# Altium PCB B293A MiRLIN Integrated PIC32.PcbDoc (part 3 of 3)
Units mm, origin at the board's own origin, x right, y up, seen from the top; angles counter-clockwise.
Board outline 134.25 x 90.25 mm, 4 copper layers (Component Side, Ground Plane, Power Plane, Solder Side), stack 0.651 mm thick; 223 components, 154 nets, 813 pads, 160 vias.
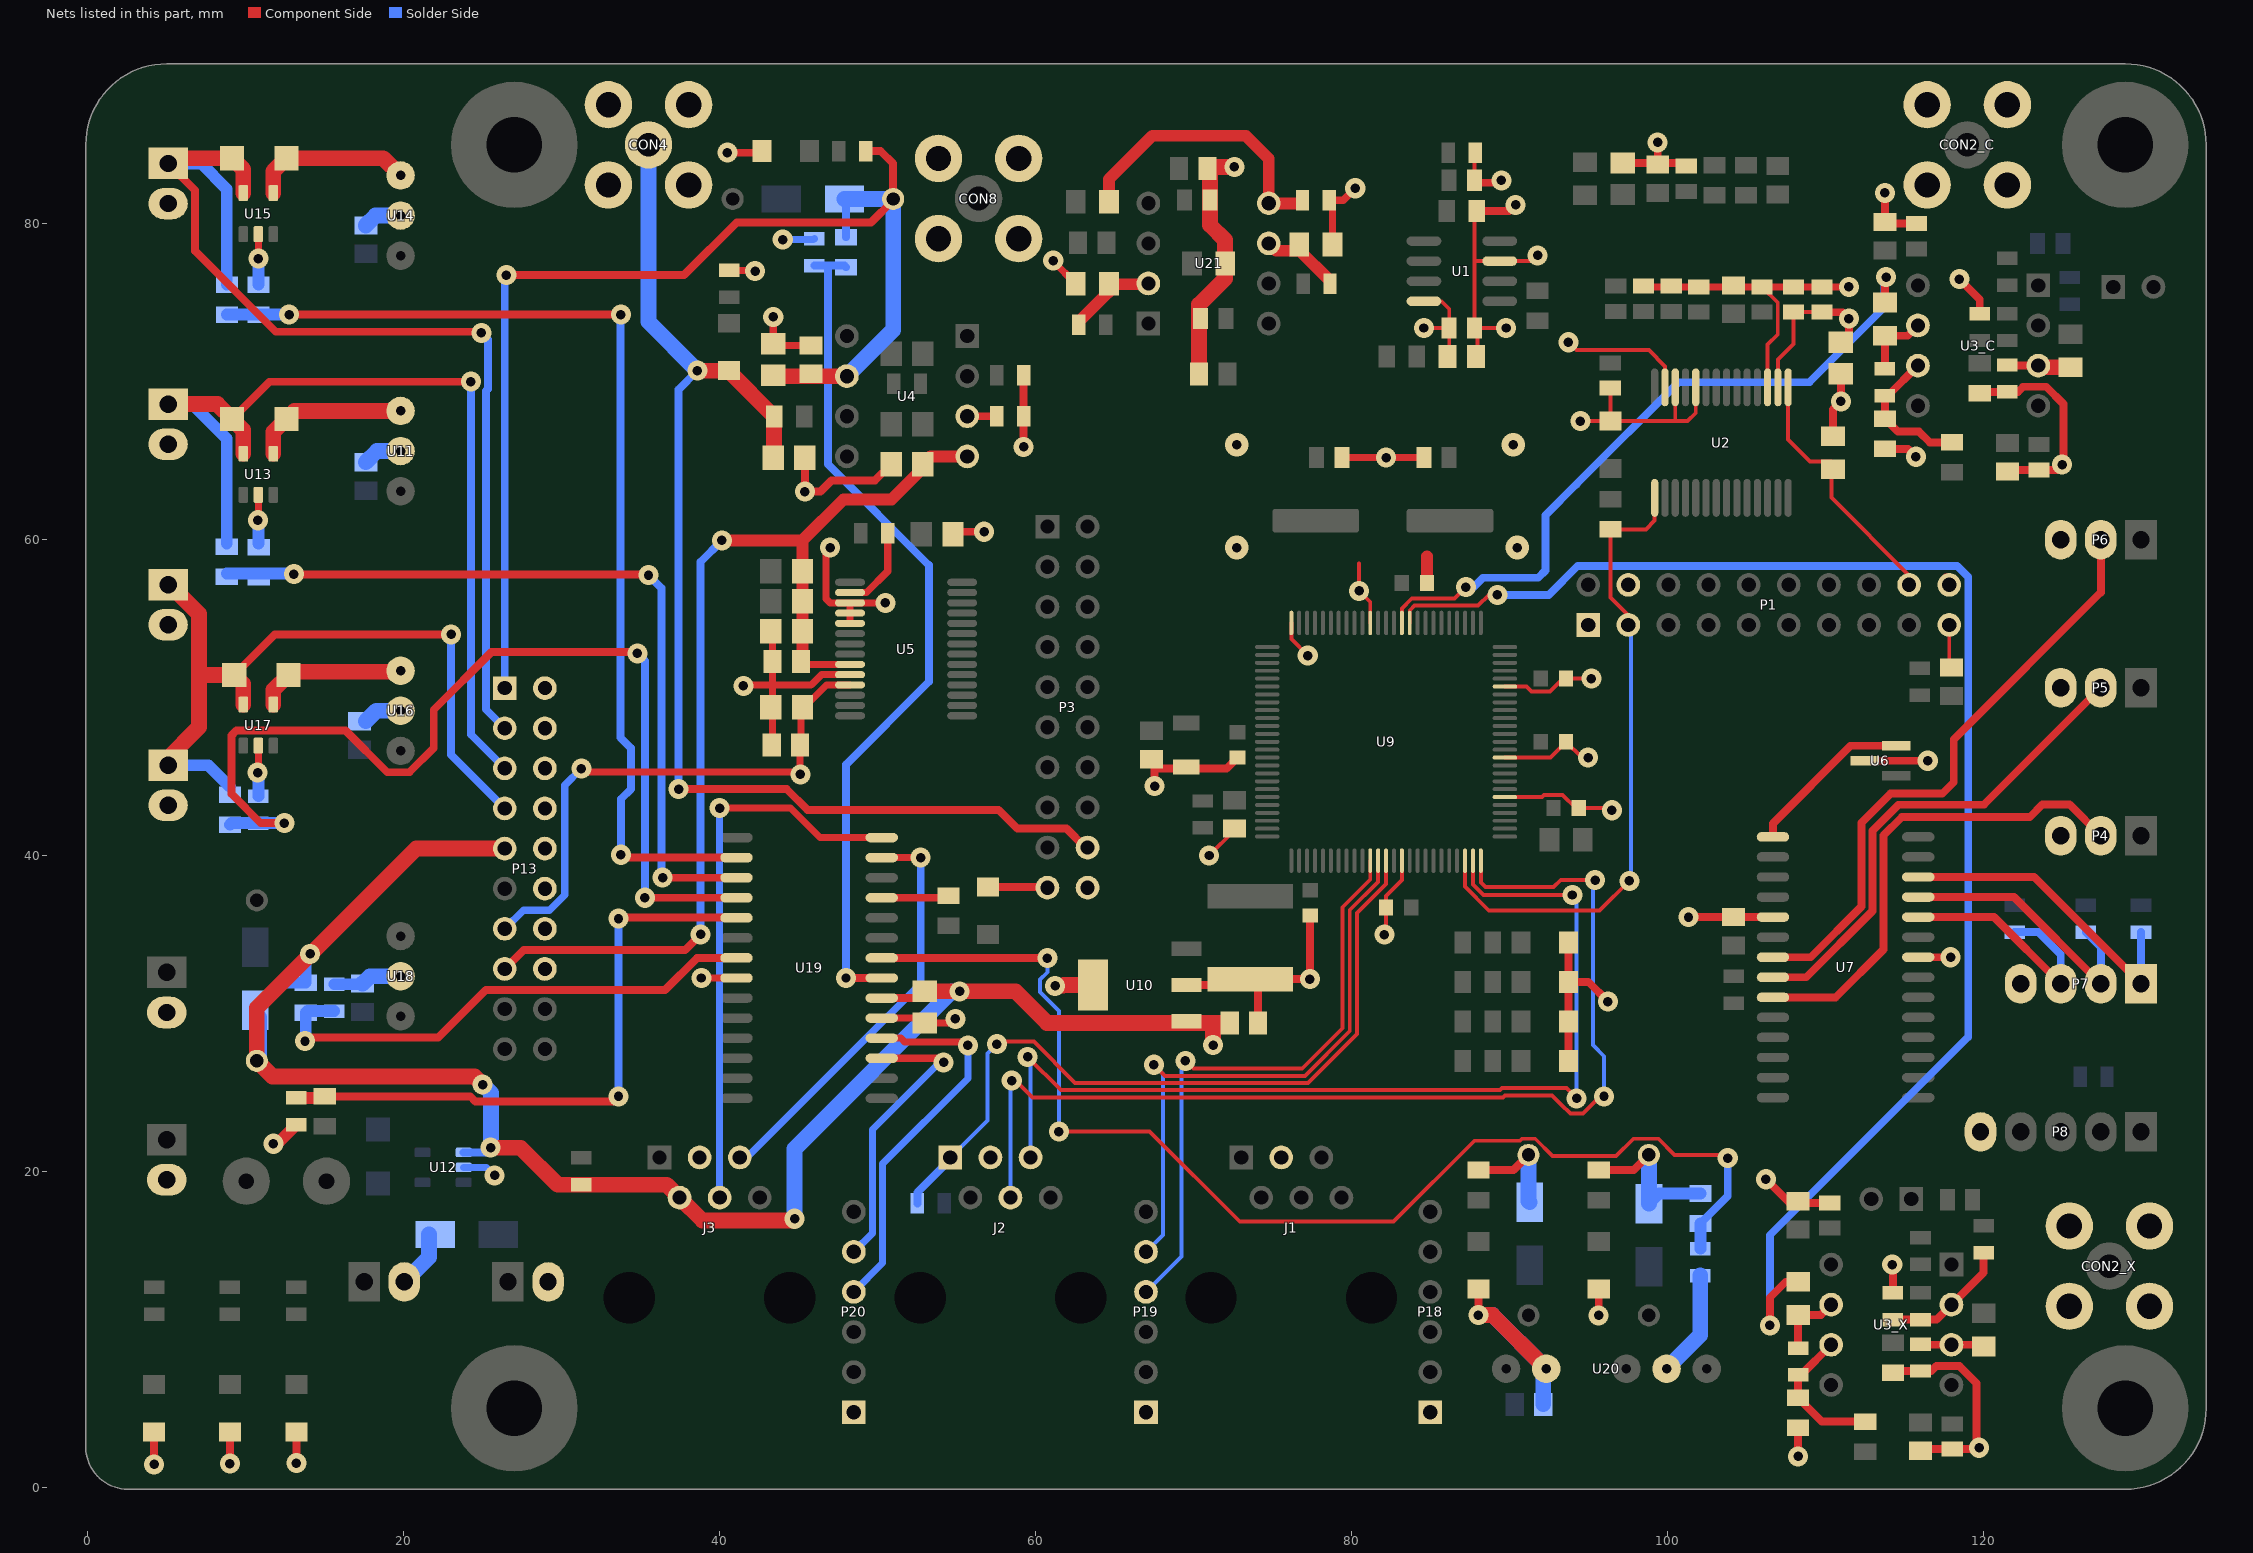
[diagram p5: the nets of this part, all layers, seen from the top]

## Via types
v1: diameter 1.27, hole 0.6, Component Side to Solder Side, 155 vias
v2: diameter 1.5, hole 0.6, Component Side to Solder Side, 5 vias

## Nets (pads, with @x,y where several pads share a name; then routed paths per layer and width w, separated by ;. In a path a pad name is that pad's centre, name@x,y a point inside that pad or via, vN(x,y) a via of type N, cw(c..) or ccw(c..) an arc to the next point about the centre after c; other vN are vias at no path point) (continued)
NetR10_X_1: R10_X.1 R11_X.1 R18_X.2 U3_X.2 | length 8.2
  Component Side w0.5: R18_X.2@114.29,10.61 R11_X.1@116.04,10.61 117.05,10.61 U3_X.2@118,11.56 120.04,13.6 R10_X.1@120.04,14.86
NetR12_C_1: R12_C.1 R13_C.1 R20_C.2 U3_C.6 | length 9.2
  Component Side w0.5: U3_C.6@115.88,71.02 113.97,69.11 R13_C.1@113.79,69.11 R20_C.2@113.79,67.66 114.615,66.835 115.949,66.835 116.624,66.16 R12_C.1@118.04,66.16
NetR12_X_1: R12_X.1 R13_X.1 R20_X.2 U3_X.6 | length 9.2
  Component Side w0.5: U3_X.6@110.38,9.02 108.47,7.11 R13_X.1@108.29,7.11 R20_X.2@108.29,5.66 109.79,4.16 R12_X.1@112.54,4.16
NetR13_C_2: R13_C.2 R16_C.1 U3_C.7 | length 4.5
  Component Side w0.5: R13_C.2@113.79,70.81 R16_C.1@113.79,72.91 115.23,72.91 U3_C.7@115.88,73.56
NetR13_X_2: R13_X.2 R16_X.1 U3_X.7 | length 4.5
  Component Side w0.5: R13_X.2@108.29,8.81 R16_X.1@108.29,10.91 109.73,10.91 U3_X.7@110.38,11.56
NetR15_C_1: R15_C.1 R17_C.2 U3_C.3 | length 4.1
  Component Side w0.5: R17_C.2@121.54,71.06 121.58,71.02 U3_C.3@123.5,71.02
  Component Side w1: U3_C.3@123.5,71.02 123.61,70.91 R15_C.1@125.54,70.91
NetR15_X_1: R15_X.1 R17_X.2 U3_X.3 | length 4.1
  Component Side w0.5: R17_X.2@116.04,9.06 116.08,9.02 U3_X.3@118,9.02 119.93,9.02 R15_X.1@120.04,8.91
NetR16_C_2: R16_C.2 U9.61 | length 45
  Component Side w0.25: U9.61@83.2,54.725 83.2,55.648 83.827,56.275 86.525,56.275 v1(87.25,57)
  Component Side w0.5: R16_C.2@113.79,75.01 113.79,76.553 v1(113.865,76.628)
  Solder Side w0.5: v1(87.25,57) 87.75,57 88.335,57.585 91.835,57.585 92.293,58.043 92.293,61.542 94.25,63.5 100.716,69.966 109,69.966 113.75,74.716 113.75,76.513 v1(113.865,76.628)
NetR16_X_2: R16_X.2 U9.60 | length 94.2
  Component Side w0.25: U9.60@83.7,54.725 83.7,55.511 84.014,55.825 88.035,55.825 88.71,56.5 v1(89.25,56.5)
  Component Side w0.5: v1@106.5,10.25 106.5,12 107.51,13.01 R16_X.2@108.29,13.01
  Solder Side w0.5: v1(89.25,56.5) 92.5,56.5 94.34,58.34 118.357,58.34 119.06,57.637 119.06,28.516 106.5,15.956 v1(106.5,10.25)
NetR23_1: R23.1 U5.16 | length 5.3
  Component Side w0.45: U5.16@48.26,56.65 49.3,56.65 50.65,58 R23.1@50.65,60.4
NetR25_2: R25.2 U4.3 | length 1.9
  Component Side w0.45: U4.3@55.68,67.81 57.54,67.81 R25.2@57.55,67.8
NetR41_1: R41.1 U11.3 U13.4 | length 9.6
  Component Side w1: U13.4@11.745,65.435 11.745,66.815 R41.1@12.57,67.64 13.08,68.15 U11.3@19.46,68.15
NetR46_1: R46.1 U14.3 U15.4 | length 10.2
  Component Side w1: U15.4@11.745,81.945 11.745,83.325 R46.1@12.57,84.15 18.71,84.15 U14.3@19.8,83.06
NetR53_1: R53.1 U16.3 U17.4 | length 9.1
  Component Side w1: U17.4@11.745,49.56 11.745,50.48 R53.1@12.7,51.435 12.905,51.64 U16.3@19.46,51.64
NetR63_1: R63.1 R67.2 U21.6 | length 5.7
  Component Side w0.75: U21.6@74.77,78.76 75.24,78.29 R67.2@76.71,78.29 ; R67.2@76.91,78.49 R67.2@76.71,78.69 76.71,78.328 78.65,76.388 R63.1@78.65,76.2
NetR64_1: R64.1 R69.2 U21.2 | length 5.9
  Component Side w0.75: R64.1@62.75,73.6 62.75,73.788 64.65,75.688 R69.2@64.65,76.2 64.675,76.175 67.105,76.175 U21.2@67.15,76.22
NetR65_1: R65.1 R66.2 U21.5 | length 18.1
  Component Side w0.75: R65.1@64.65,81.4 64.65,82.817 67.408,85.575 73.326,85.575 74.77,84.131 U21.5@74.77,81.3 74.78,81.29 R66.2@76.71,81.29
NetR70_2: R70.2 U19.25 | length 4.3
  Component Side w0.5: U19.25@50.27,37.325 54.375,37.325 R70.2@54.5,37.45
OE#: P1.18 R8.1 U2.15 | length 15.9
  Component Side w0.25: U2.15@107.66,69.645 107.66,66.34 109.05,64.95 110.4,64.95 110.4,64.45 110.4,62.66 P1.18@115.32,57.74
OVR: P1.3 R9.2 U2.1 U9.23 | length 40.2
  Component Side w0.25: U9.23@87.2,39.675 87.2,38.027 88.701,36.526 95.726,36.526 v1(97.6,38.4) ; P1.3@97.54,55.2 96.4,56.34 R9.2@96.4,60.65 98.66,60.65 99.21,61.2 U2.1@99.21,62.645
  Solder Side w0.25: P1.3@97.54,54.6 97.71,54.43 97.71,38.51 v1(97.6,38.4)
P32_MCLR#: J2.1 R34.2 U9.13 | length 49.3
  Component Side w0.25: v1(57.554,28.054) 57.71,28.21 59.898,28.21 62.518,25.59 77.249,25.59 80.35,28.691 80.35,36.35 82.2,38.2 U9.13@82.2,39.675
  Component Side w0.5: J2.1@54.205,20.83 54.383,20.653 J2.1@54.495,20.54
  Solder Side w0.25: J2.1@54.61,20.88 56.965,23.235 56.965,27.465 v1(57.554,28.054)
  Solder Side w0.5: R34.2@52.525,17.975 52.525,18.675 J2.1@54.52,20.67
P32_PGEC: J2.5 U9.24 | length 63.5
  Component Side w0.25: v1(59.5,27.25) 61.61,25.14 89.416,25.14 89.542,25.267 93.619,25.267 v1(94.264,24.622) ; U9.24@87.7,39.675 87.7,38.164 88.364,37.5 v1(94,37.5)
  Solder Side w0.25: v1(59.5,27.25) 59.69,27.06 J2.5@59.69,20.88 ; v1(94,37.5) 94.264,37.236 v1(94.264,24.622)
P32_PGED: J2.4 U9.25 | length 69.3
  Component Side w0.25: v1(58.5,25.75) 58.75,25.75 59.81,24.69 89.602,24.69 89.729,24.817 92.711,24.817 93.29,24.238 93.866,23.662 94.662,23.662 95.75,24.75 v1(96,24.75) ; U9.25@88.2,39.675 88.2,38.3 88.5,38 92.8,38 93.26,38.46 95.42,38.46 v1(95.44,38.44)
  Solder Side w0.25: J2.4@58.42,18.34 58.42,25.67 v1(58.5,25.75) ; v1(95.44,38.44) 95.29,38.29 95.29,28 96,27.29 v1(96,24.75)
P32_RX: P19.4 U9.11 | length 38.2
  Component Side w0.25: v1(69.5,27) 70,26.5 76.886,26.5 79.45,29.064 79.45,36.723 81.2,38.473 U9.11@81.2,39.675
  Solder Side w0.25: P19.4@67,12.37 69.25,14.62 69.25,26.75 v1(69.5,27)
P32_TX: P19.5 U9.12 | length 37.9
  Component Side w0.25: v1(67.5,26.75) 68.21,26.04 77.063,26.04 79.9,28.877 79.9,36.536 81.7,38.336 U9.12@81.7,39.675
  Solder Side w0.25: P19.5@67,14.91 68.075,15.985 68.075,26.175 v1(67.5,26.75)
PGEC: J3.5 U19.27 | length 28.3
  Component Side w0.45: v1(52.735,39.865) v1@52.335,39.865 ; v1@52.335,39.865 U19.27@50.27,39.865 51.8,39.865 v1@52.335,39.865
  Solder Side w0.45: J3.5@41.575,20.74 52.735,31.9 v1(52.735,39.865)
PGED: J3.4 U19.28 | length 35.7
  Component Side w0.45: J3.4@40,18.345 J3.4@40.005,18.34 ; v1(40,43) 44.5,43 46.365,41.135 U19.28@50.27,41.135
  Solder Side w0.45: J3.4@40,18.345 v1(40,43)
PIC_RS232_RX: P20.4 U19.18 | length 24.2
  Component Side w0.45: U19.18@50.27,28.435 51.484,28.435 51.719,28.2 55.504,28.2 v1(55.72,27.983)
  Solder Side w0.45: P20.4@48.5,12.37 50.325,14.195 50.325,20.48 55.72,25.875 v1(55.72,27.983)
PIC_RS232_TX: P20.5 U19.17 | length 18.5
  Component Side w0.45: U19.17@50.27,27.165 53.914,27.165 v1(54.179,26.9)
  Solder Side w0.45: P20.5@48.5,14.91 49.675,16.085 49.675,22.654 53.821,26.8 54.079,26.8 v1(54.179,26.9)
TEMP0: U6.2 U7.15 | length 10.7
  Component Side w0.5: U7.15@106.695,41.18 106.695,42.031 111.614,46.95 U6.2@114.5,46.95
TEMP1: P4.2 U7.23 | length 30.9
  Component Side w0.5: U7.23@106.695,31.02 110.666,31.02 113.7,34.054 113.7,41.277 114.849,42.427 122.957,42.427 123.769,43.238 125.472,43.238 P4.2@127.46,41.25
TEMP2: P5.2 U7.22 | length 31.3
  Component Side w0.5: U7.22@106.695,32.29 108.807,32.29 113,36.483 113,41.567 114.648,43.215 120.05,43.215 P5.2@127.46,50.625
TEMP3: P6.2 U7.21 | length 38.4
  Component Side w0.5: U7.21@106.695,33.56 109.087,33.56 112.3,36.773 112.3,42.074 114.142,43.915 117.418,43.915 118.142,44.639 118.142,47.347 127.46,56.665 P6.2@127.46,60
TRIG0: P7.1 R30.1 U7.12 | length 20.7
  Component Side w0.5: U7.12@115.379,38.64 U7.12@115.895,38.64 123.235,38.64 P7.1@130,31.875
  Solder Side w0.5: P7.1@130,31.875 R30.1@130,35.15
TRIG1: P7.2 R29.1 U7.11 | length 17.5
  Component Side w0.5: U7.11@115.895,37.37 121.965,37.37 P7.2@127.46,31.875
  Solder Side w0.5: R29.1@126.5,35.15 127.46,34.19 P7.2@127.46,31.875
TRIG2: P7.3 R28.1 U7.10 | length 16.1
  Component Side w0.5: U7.10@115.895,36.1 120.695,36.1 P7.3@124.92,31.875
  Solder Side w0.5: R28.1@122,35.15 123.5,35.15 124.92,33.73 P7.3@124.92,31.875
V_+5VDC: C43.1 C56.1 D1.1 J3.2 L2.2 P13.9 R56.2 R58.1 U10.1 U12.1 U19.20 | length 117.5
  Component Side w0.5: U19.20@50.27,30.975 52.575,30.975 C56.1@53,31.4
  Component Side w1: v1(25,25.5) 24.5,26 11.7,26 L2.2@10.7,27 10.7,30.35 14.098,33.748 20.79,40.44 P13.9@26.4,40.44 ; v1(25.5,21.5) 27.4,21.5 29.75,19.15 R58.1@31.25,19.15 36.655,19.15 J3.2@37.465,18.34 38.915,16.89 44.64,16.89 v1(44.75,17) ; C56.1@53,31.4 v1(55.2,31.4) 58.738,31.4 60.738,29.4 69.55,29.4 71.25,29.4 ; v1(71.25,28) 71.25,29.4 ; C43.1@72.3,29.4 71.25,29.4
  Solder Side w0.5: U12.1@23.795,21.2 25.2,21.2 v1(25.5,21.5)
  Solder Side w0.75: D1.1@10.6,30.2 12.35,31.95 R56.2@13.8,31.95 13.8,33.45 14.071,33.721 v1(14.071,33.775)
  Solder Side w1: L2.2@10.7,27 10.83,27.13 D1.1@10.83,29.75 ; v1(25,25.5) 25.535,24.965 25.535,21.535 v1(25.5,21.5) ; v1(44.75,17) 44.75,21.438 54.712,31.4 v1(55.2,31.4)
V_+5VDCA: C1.2 C2.2 C14.2 C15.2 C16.2 C34.2 C35.2 D3.1 L4.2 P1.1 P13.13 R4.1 R48.2 R61.2 U1.7 U2.16 U2.27 U5.25 | length 81.1
  Component Side w0.25: C1.2@87.9,73.3 88,73.2 C2.2@88,71.6 ; R4.1@87.95,80.8 87.8,80.65 87.8,77.6 ; v1(89.8,73.4) C1.2@87.8,73.4 87.8,77.6 ; v1(91.8,78) 91.435,77.635 U1.7@89.4,77.635 87.835,77.635 87.8,77.6 ; v1(93.75,72.5) 94.25,72 98.836,72 99.86,70.976 U2.27@99.86,69.645 ; U2.16@107.01,69.645 107.01,71.41 108,72.4 C14.2@108,74.4 109.6,74.4 C15.2@109.7,74.3 ; v1@111.375,73.875 v1@111.5,73.75
  Component Side w0.45: v1(31.25,45.5) 31.45,45.3 45.1,45.3 C35.2@45.1,47 ; C35.2@45.15,47.47 45.15,49.275 C34.2@45.25,49.375 45.355,49.375 46.78,50.8 U5.25@48.26,50.8
  Component Side w0.5: R4.1@87.95,80.8 90,80.8 v1(90.4,81.2) ; R48.2@95.665,20.085 97.885,20.085 L4.2@98.84,21.04 ; C15.2@109.8,74.4 111.1,74.4 v1(111.5,74) ; C16.2@111.5,72.25 111.5,72.5 v1@111.5,73.75
  Solder Side w0.45: P13.13@26.4,35.36 27.575,36.535 29.237,36.535 30.2,37.498 30.2,44.45 v1(31.25,45.5)
  Solder Side w0.75: D3.1@98.84,17.96 99.48,18.6 R61.2@102.1,18.6
  Solder Side w1: D3.1@98.84,17.96 L4.2@98.84,21.04 L4.2@98.935,21.135
  other v1: 45.112,45.142
V_+24VDCA: C25.2 C26.1 D2.1 L3.2 P13.1 R47.2 R59.2 U4.7 | length 79.9
  Component Side w0.5: v1(26.5,76.75) 37.75,76.75 41.085,80.085 49.585,80.085 50.99,81.49 L3.2@50.99,81.57 50.99,83.81 50.2,84.6 R47.2@49.25,84.6 R47.2@49.25,84.611 ; C26.1@42.96,70.4 C26.1@43.4,70.4
  Component Side w1: C26.1@43.85,70.35 45.8,70.35 U4.7@48.06,70.35
  Solder Side w0.5: P13.1@26.4,50.6 26.4,76.75 26.4,76.85 v1(26.5,76.75) ; D2.1@47.91,81.57 48,81.48 R59.2@48,79.15
  Solder Side w1: D2.1@47.91,81.57 L3.2@50.99,81.57 50.99,73.28 U4.7@48.06,70.35
V_-5VDCA: C29.2 C30.1 C31.1 C32.1 C33.2 D4.2 L5.2 P13.15 R51.1 U4.4 U5.23 | length 74.1
  Component Side w0.45: C32.1@45.17,52.1 U5.23@48.26,52.1
  Component Side w0.5: P13.15@26.4,32.82 27.6,34.02 37.82,34.02 v1(38.8,35) ; R51.1@88.045,20.085 90.265,20.085 L5.2@91.22,21.04
  Component Side w0.75: v1(40.15,59.95) 45.25,59.95 ; C32.1@45.15,52.28 45.25,52.38 C33.2@45.25,54.185 C31.1@45.25,56.09 C30.1@45.25,57.995 45.25,59.95 ; U4.4@55.68,65.27 53.36,65.27 C29.2@52.87,64.78 52.87,64.517 50.903,62.55 47.85,62.55 45.25,59.95
  Solder Side w0.5: v1(38.8,35) 38.8,58.6 v1(40.15,59.95)
  Solder Side w1: L5.2@91.22,21.04 91.22,18.13 D4.2@91.3,18.05
V_MMIC: P13.7 P14.1 P15.1 R53.2 R54.2 U17.5 | length 48.9
  Component Side w0.5: R53.2@9.271,51.435 11.836,54 v1(23,54)
  Component Side w1: P15.1@4.95,46.05 7.03,48.13 7.03,51.4 ; P14.1@5.08,57.15 5.194,57.15 7.03,55.314 7.03,51.4 ; U17.5@9.845,49.56 9.845,50.861 R53.2@9.271,51.435 7.065,51.435 7.03,51.4
  Solder Side w0.5: v1(23,54) 23,46.38 P13.7@26.4,42.98
  Solder Side w0.75: P15.1@5.08,45.72 7.63,45.72 R54.2@9,44.35
V_MULT: P12.1 P13.3 R46.2 R50.2 U15.5 | length 69.5
  Component Side w0.5: P12.1@5.08,83.82 6.78,82.12 6.78,78.286 11.901,73.165 24.915,73.165 v1(24.915,73.085)
  Component Side w1: P12.1@5.08,83.82 5.41,84.15 R46.2@9.141,84.15 9.845,83.446 U15.5@9.845,81.945
  Solder Side w0.5: v1(24.915,73.085) 25.335,72.665 25.335,69.551 25.2,69.416 25.2,49.26 P13.3@26.4,48.06
  Solder Side w0.75: P12.1@5.08,83.82 7.18,83.82 8.8,82.2 R50.2@8.8,76.15
V_VCO: P10.1 P13.5 R41.2 R43.2 U13.5 | length 59.7
  Component Side w0.5: R41.2@9.141,67.64 11.501,70 v1(24.25,70)
  Component Side w1: P10.1@5.08,68.58 8.201,68.58 R41.2@9.141,67.64 9.845,66.936 U13.5@9.845,65.435
  Solder Side w0.5: v1(24.25,70) 24.25,47.67 P13.5@26.4,45.52
  Solder Side w0.75: P10.1@5.08,68.58 6.62,68.58 8.8,66.4 R43.2@8.8,59.75
VM_+5VDC: R56.1 R57.2 U19.7 | length 32.7
  Component Side w0.5: v1@13.8,28.6 13.93,28.47 22.19,28.47 25.2,31.48 36.546,31.48 38.581,33.515 U19.7@41.07,33.515
  Solder Side w0.75: v1@13.8,28.6 R56.1@13.8,30.05 13.9,30.15 R57.2@15.6,30.15
  other v1: 13.75,28.25
VM_+5VDCA: R61.1 R62.2 U19.22 | length 76.9
  Component Side w0.25: v1(61.485,22.515) 67.235,22.515 72.935,16.815 82.673,16.815 87.796,21.939 90.669,21.939 90.795,22.065 91.645,22.065 92.748,20.962 96.751,20.962 97.855,22.065 99.441,22.065 100.466,21.04 103.639,21.04 v1(103.835,20.843)
  Component Side w0.5: U19.22@50.27,33.515 60.735,33.515 v1(60.75,33.5)
  Solder Side w0.25: v1(60.75,33.5) 60.75,32.608 60.29,32.148 60.29,31.352 61.485,30.157 v1(61.485,22.515)
  Solder Side w0.5: R61.1@102.1,16.7 103.835,18.435 v1(103.835,20.843)
  Solder Side w0.75: R62.2@102.1,15.1 R61.1@102.1,16.7
VM_+24VDCA: R59.1 R60.2 U19.21 | length 54.3
  Component Side w0.5: v1(48.005,32.245) U19.21@50.27,32.245
  Solder Side w0.5: R60.2@46,77.35 46.95,77.35 ; R59.1@48,77.25 47.9,77.35 46.95,77.35 ; v1(48.005,32.245) 48.005,45.755 53.25,51 53.25,58.383 46.86,64.773 46.86,77.26 46.95,77.35
VM_BAT: R42.1 R45.2 U19.5 | length 39.5
  Component Side w0.5: R42.1@15,24.75 24.216,24.75 24.551,24.415 33.265,24.415 v1(33.6,24.75) ; v1(33.6,36) 33.685,36.085 41.04,36.085 U19.5@41.07,36.055
  Component Side w0.75: R45.2@13.2,24.65 14.9,24.65 R42.1@15,24.75
  Solder Side w0.5: v1(33.6,24.75) v1(33.6,36)
VM_MMIC: R54.1 R55.2 U19.4 | length 64.3
  Component Side w0.5: v1(12.45,42.05) 10.95,42.05 9.095,43.905 9.095,47.602 9.403,47.91 16.315,47.91 18.955,45.27 20.359,45.27 21.9,46.811 21.9,49.226 25.559,52.885 34.715,52.885 v1(34.8,52.8) ; v1(35.275,37.325) U19.4@41.07,37.325
  Solder Side w0.5: v1(34.8,52.8) 35.275,52.325 v1(35.275,37.325)
  Solder Side w0.75: R54.1@9,41.95 9.1,42.05 R55.2@10.8,42.05 v1(12.45,42.05)
VM_MULT: R50.1 R52.2 U19.2 | length 67.1
  Component Side w0.5: v1(12.75,74.25) v1(33.75,74.25) ; v1(33.75,40.05) 33.935,39.865 U19.2@41.07,39.865
  Solder Side w0.5: v1(33.75,40.05) 33.75,43.566 34.385,44.201 34.385,46.799 33.715,47.469 33.715,74.215 v1(33.75,74.25)
  Solder Side w0.75: R50.1@8.8,74.25 R52.2@10.8,74.25 v1(12.75,74.25)
VM_VCO: R43.1 R44.2 U19.3 | length 50.9
  Component Side w0.5: v1(13.048,57.821) 13.068,57.8 35.45,57.8 v1(35.5,57.75) ; v1(36.395,38.595) U19.3@41.07,38.595
  Solder Side w0.5: v1(35.5,57.75) 36.322,56.928 36.322,38.668 v1(36.395,38.595)
  Solder Side w0.75: R43.1@8.8,57.85 10.82,57.85 13.018,57.85 v1(13.048,57.821)
VOUT: C28.1 CON4.1 L1.A P3.18 R24.1 | length 78.7
  Component Side w0.5: v1(37.407,44.201) 44.254,44.201 45.563,42.891 57.665,42.891 58.851,41.705 61.96,41.705 63.16,40.505 P3.18@63.3,40.505 ; v1(38.593,70.7) v1@38.9,70.7
  Component Side w1: v1@38.9,70.7 L1.A@40.55,70.7 ; L1.A@40.6,70.7 L1.A@40.55,70.7 ; C28.1@43.4,65.2 43.45,65.25 R24.1@43.45,67.8 40.575,70.675 L1.A@40.55,70.7
  Solder Side w0.5: v1(37.407,44.201) 37.407,69.514 v1(38.593,70.7)
  Solder Side w1: CON4.1@35.5,85 35.5,73.793 v1(38.593,70.7)
VSS: C1.1 C2.1 C3.1 C4.1 C5.1 C8.1 C9.1 C10.1 C11.1 C12.1 C13.1 C14.1 C15.1 C16.1 C17.2 C19_C.1 C19_X.1 C20_C.1 C20_X.1 C21_C.1 C21_X.1 C22_C.1 C22_X.1 C25.1 C26.2 C27.1 C28.2 C29.1 C32.2 C33.1 C34.1 C35.1 C36.2 C37.2 C38.2 C39.2 C40.1 C41.1 C42.2 C43.2 C44.2 C45.2 C46.2 C47.2 C48.2 C49.2 C50.2 C51.1 C52.1 C53.1 C54.1 C55.1 C56.2 C57.1 C58.1 C60.1 C61.1 C62.1 CON2_C.2 CON2_C.3 CON2_C.4 CON2_C.5 CON2_X.2 CON2_X.3 CON2_X.4 CON2_X.5 CON4.2 CON4.3 CON4.4 CON4.5 CON8.2 CON8.3 CON8.4 CON8.5 D5.1 J1.3 J2.3 J3.3 LED1.K LED2.K LED3.K LED4.K LED5.K LED6.A LED7.K LED8.K LED9.K LED10.K LED11.K LED12.K P1.4 P1.19 P1.20 P3.19 P3.20 P4.3 P5.3 P6.3 P7.4 P8.5 P9.2 P10.2 P11.2 P12.2 P13.2 P13.4 P13.6 P13.8 P13.10 P13.12 P13.14 P13.16 P14.2 P15.2 P16.2 P17.2 P18.1 P19.1 P20.1 R6.2 R8.2 R17_C.1 R17_X.1 R18_C.1 R18_X.1 R19_C.1 R19_X.1 R20_C.1 R20_X.1 R22.2 R25.1 R26.1 R44.1 R45.1 R52.1 R55.1 R57.1 R60.1 R62.1 R66.1 R67.1 R68.1 R69.1 U1.4 U2.17 U2.24 U2.26 U5.17 U5.18 U5.19 U5.24 U6.3 U7.8 U7.19 U9.15 U9.31 U9.36 U9.45 U9.65 U9.75 U10.2 U10.4 U11.2 U12.2 U13.2 U14.2 U15.2 U16.2 U17.2 U18.2 U19.8 U19.19 U20.2 U20.5 | length 328.9
  Component Side w0.25: v1(71,40) 72.6,41.6 C42.2@72.6,41.7 ; U9.75@76.2,54.725 76.2,53.7 v1(77.24,52.66) ; 80.5,58.5 v1(80.5,56.75) 81.2,56.05 U9.65@81.2,54.725 ; v1(82.09,34.991) 82.2,35.102 C45.2@82.2,36.7 82.2,37.45 83.2,38.45 U9.15@83.2,39.675 ; v1(84.6,73.4) C1.1@86.2,73.4 ; U1.4@84.6,75.095 85.705,75.095 86.2,74.6 C1.1@86.2,73.4 ; C2.1@86.1,71.6 C2.1@86.2,71.7 ; C2.1@86.2,71.6 C2.1@86.2,71.7 ; C5.1@87.8,82.6 C5.1@87.8,82.75 87.8,84.15 R6.2@87.85,84.2 ; U9.31@89.725,43.7 92.086,43.7 92.211,43.825 93.385,43.825 94.21,43 C46.2@94.4,43 96.368,43 v1(96.502,42.866) ; U9.36@89.725,46.2 92.6,46.2 C47.2@93.6,47.2 94.6,46.2 v1(95,46.2) ; U9.45@89.725,50.7 91.09,50.7 91.415,50.375 92.585,50.375 93.41,51.2 C48.2@93.6,51.2 v1(95.2,51.2) ; v1(94.5,67.5) LED1.K@96.4,67.5 ; C17.2@96.4,69.6 LED1.K@96.4,67.5 ; U2.26@100.51,69.645 100.51,67.59 100.6,67.5 ; U2.24@101.81,69.645 101.81,68.01 101.3,67.5 100.6,67.5 ; C13.1@106,76 106.01,76 107,75.01 107,73 106.36,72.36 U2.17@106.36,69.645 ; P1.20@117.61,57.74 P1.20@117.86,57.74 ; P1.19@117.86,54.6 117.86,52.04 C39.2@118,51.9 ; C2.1@86.2,71.7 C1.1@86.2,73.4 ; C2.1@86.2,71.7 C1.1@86.2,73.4 ; LED1.K@96.4,67.5 100.6,67.5
  Component Side w0.45: v1(10.75,45.25) 10.75,45.09 v1@10.795,45.045 ; v1@10.795,45.545 U17.2@10.795,46.96 ; v1@10.795,61.205 10.795,61.228 U13.2@10.795,62.835 ; U15.2@10.795,79.345 10.795,77.805 v1(10.8,77.8) ; v1(38.845,32.245) U19.8@41.07,32.245 ; v1(40.5,84.5) 42.6,84.5 LED7.K@42.7,84.6 ; R26.1@40.6,77.05 42.2,77.05 v1(42.25,77) ; v1(41.512,50.741) 41.572,50.8 43.35,50.8 ; C33.1@43.25,54.185 C33.1@43.35,54.085 ; C35.1@43.3,47 43.35,47.05 43.35,49.375 43.35,50.8 ; C33.1@43.35,53.885 C32.2@43.35,52.28 43.35,50.8 ; v1(43.4,74.1) C26.2@43.4,72.4 43.5,72.3 C25.1@45.8,72.3 ; v1(47,59.5) 46.75,59.25 46.75,56.25 47,56 U5.17@48.26,56 U5.18@48.26,55.35 U5.19@48.26,54.7 ; U5.24@48.26,51.45 46.45,51.45 45.8,50.8 43.35,50.8 ; U5.17@48.26,56 v1(50.5,56) ; U19.19@50.27,29.705 52.695,29.705 C56.2@53,29.4 54.65,29.4 54.903,29.653 v1(54.927,29.653) ; C27.1@54.775,60.335 54.94,60.5 v1(56.75,60.5) ; v1@61,77.75 61.106,77.644 R69.1@62.55,76.2 ; R67.1@78.81,78.69 78.81,81.29 R66.1@78.61,81.49 79.49,81.49 v1(80.25,82.25) ; C41.1@79.4,65.2 v1(82.2,65.2) C40.1@84.6,65.2 ; C8.1@98.8,76 100.25,76 C11.1@102,76 104.1,76 C12.1@104.2,76.1 104.3,76 C13.1@106,76 ; C13.1@106.01,76 C14.1@108,76 C15.1@109.5,76 ; C15.1@109.8,76 v1(111.5,76)
  Component Side w0.5: v1(4.2,1.446) LED10.K@4.2,3.5 ; v1(9,1.494) LED9.K@9,3.5 ; v1(13.2,1.522) LED12.K@13.2,3.5 ; C28.2@45.4,65.2 v1(45.4,63.042) 46.39,63.042 47.091,63.743 49.833,63.743 C29.1@50.87,64.78 ; LED11.K@57,38 60.725,38 P3.19@60.76,37.965 ; v1(59.25,65.877) R25.1@59.25,67.8 R22.2@59.25,70.4 ; C37.2@67.35,46.1 67.55,45.9 67.55,45.5 ; v1(67.55,44.4) 67.55,45.5 ; U10.2@69.55,31.8 73.225,31.8 C62.1@73.6,32.175 ; C50.2@72.8,46.2 72.1,45.5 69.55,45.5 67.55,45.5 ; C43.2@74.1,29.4 74.1,31.675 C62.1@73.6,32.175 ; C44.2@77.4,36.2 77.375,36.175 v1(77.375,32.175) C62.1@73.6,32.175 ; C5.1@87.8,82.6 v1@89.2,82.6 ; v1(88.045,10.905) LED6.A@88.045,12.555 ; LED2.K@93.75,27 LED5.K@93.75,29.5 LED4.K@93.75,32 ; LED3.K@93.75,34.5 LED4.K@93.75,32 ; v1(95.665,10.885) LED8.K@95.665,12.555 ; v1(96.25,30.75) 95,32 LED4.K@93.75,32 ; C3.1@97.2,83.85 C9.1@99.4,83.85 ; C9.1@99.4,83.75 C9.1@99.4,83.85 ; v1(99.4,85.15) C9.1@99.4,83.85 ; C10.1@101.2,83.65 101,83.85 C9.1@99.4,83.85 ; v1(101.35,36.1) C36.2@104.2,36.1 U7.19@106.695,36.1 ; v1(106.25,19.5) 107.74,18.01 108.29,18.01 C20_X.1@110.29,18.01 ; v1(108.29,1.96) R20_X.1@108.29,3.76 ; R8.2@110.5,66.55 110.5,68.25 v1(111,68.75) C16.1@111,70.5 ; U6.3@112.5,46 v1(116.5,46) ; R20_C.1@113.79,65.76 113.8,65.75 115.25,65.75 v1(115.75,65.25) ; v1(113.79,81.96) C19_C.1@113.79,80.11 113.89,80.01 C20_C.1@115.79,80.01 ; v1(114.251,14.1) 114.29,14.061 R18_X.1@114.29,12.31 ; R19_X.1@114.29,7.26 114.39,7.36 R17_X.1@116.04,7.36 116.72,7.36 117.04,7.68 118.497,7.68 119.59,6.587 119.59,2.5 119.59,2.41 C21_X.1@118.04,2.41 116.14,2.41 C22_X.1@116.04,2.31 ; U7.8@115.895,33.56 v1(117.94,33.56) ; v1(118.5,76.5) 119.79,75.21 R18_C.1@119.79,74.31 ; R19_C.1@119.79,69.26 119.89,69.36 R17_C.1@121.54,69.36 122.22,69.36 122.54,69.68 123.997,69.68 125.09,68.587 125.09,64.75 125.09,64.41 125,64.41 C21_C.1@123.54,64.41 121.64,64.41 C22_C.1@121.54,64.31
  Component Side w0.75: v1(11.75,21.75) 12,21.75 R45.1@13.2,22.95 ; C49.2@84.8,57.25 84.8,58.95
  Component Side w1: v1(61.25,31.75) 61.75,31.75 61.8,31.8 U10.4@63.65,31.8 ; C57.1@70.35,70.5 70.35,74 70.35,74.88 72.01,76.54 R68.1@72.01,77.49 72.01,78.963 71.05,79.923 C60.1@71.05,81.5 71.05,83.35 C61.1@70.9,83.5 71,83.6 v1(72.6,83.6) ; v1(88.045,10.905) 88.935,10.905 U20.2@92.34,7.5
  Solder Side w0.25: v1(95,46.2) v1@95.2,46
  Solder Side w0.45: U12.2@23.795,20.25 25.25,20.25 v1(25.75,19.75) ; v1@38.8,32.2 v1(38.845,32.245) ; v1(44,79) 45.95,79 R60.1@46,79.05
  Solder Side w0.75: v1(10.75,45.25) 10.75,45 10.8,44.95 R55.1@10.8,43.75 ; v1@10.795,61.205 10.795,59.755 R44.1@10.8,59.75 ; R52.1@10.8,76.15 v1(10.8,77.8) ; R57.1@15.6,31.85 17.35,31.85 C54.1@17.4,31.9
  Solder Side w1: C54.1@17.4,31.9 17.86,32.36 U18.2@19.8,32.36 ; C53.1@17.6,48.5 18.26,49.16 U16.2@19.8,49.16 ; C51.1@17.6,64.9 18.31,65.61 U11.2@19.8,65.61 ; C52.1@17.6,79.9 18.22,80.52 U14.2@19.8,80.52 ; P16.2@20.04,13 21.6,14.56 D5.1@21.6,16 ; v1(88.045,10.905) 88.935,10.905 U20.2@92.34,7.5 92.15,7.31 C55.1@92.15,5.25 ; U20.5@99.96,7.5 102.1,9.64 R62.1@102.1,13.4
  other v1: 119.75,2.5 10.772,61.228 125,64.75 61.127,77.664 89.5,82.75
  other v2: 72.75,59.5 90.5,59.5 72.75,66 90.25,66
pads on no net: J1.6 J1.MH1 J1.MH2 J2.6 J2.MH1 J2.MH2 J3.6 J3.MH1 J3.MH2 P18.2 P18.3 P18.6 P19.2 P19.3 P19.6 P20.2 P20.3 P20.6 U1.1 U1.5 U1.8 U4.1 U4.5 U4.8 U7.5 U7.6 U7.7 U7.9 U7.13 U7.14 U7.16 U7.24 U7.25 U9.1 U9.3 U9.4 U9.5 U9.6 U9.7 U9.8 U9.9 U9.10 U9.14 U9.22 U9.28 U9.29 U9.38 U9.39 U9.40 U9.49 U9.51 U9.52 U9.53 U9.54 U9.56 U9.57 U9.58 U9.59 U9.66 U9.67 U9.73 U9.74 U9.87 U9.88 U9.89 U9.90 U9.91 U9.92 U9.94 U9.95 U9.96 U9.97 U9.98 U9.99 U9.100 U12.0 U13.0 U13.1 U15.0 U15.1 U17.0 U17.1 U19.6 U19.9 U19.10 U19.11 U19.12 U19.23 U19.24 U19.26 Y1.0

## Polygon pours and split planes (outlines as drawn)
VSS on Component Side "Component Side-No Net" (solid, pour order 5): 71.924,58.074 cw(c71.924,58.674) 71.324,58.674 71.324,66.826 cw(c71.924,66.826) 71.924,67.426 91.076,67.426 cw(c91.076,66.826) 91.676,66.826 91.676,58.674 cw(c91.076,58.674) 91.076,58.074
VSS on Ground Plane (split plane): 129.302,89.609 129.603,89.58 129.901,89.531 130.196,89.462 130.485,89.374 130.768,89.268 131.043,89.143 131.31,89 131.566,88.841 131.812,88.665 132.046,88.473 132.266,88.266 132.473,88.046 132.665,87.812 132.841,87.566 133,87.31 133.143,87.043 133.268,86.768 133.374,86.485 133.462,86.196 133.531,85.901 133.58,85.603 133.609,85.302 133.619,85.019 133.617,85.002 133.586,85.003 133.585,85 133.587,84.996 133.617,84.997 133.617,5 133.619,4.982 133.609,4.698 133.58,4.397 133.531,4.099 133.462,3.804 133.374,3.515 133.268,3.232 133.143,2.957 133,2.69 132.841,2.434 132.665,2.188 132.473,1.954 132.266,1.734 132.046,1.527 131.812,1.335 131.566,1.159 131.31,1 131.043,0.857 130.768,0.732 130.485,0.626 130.196,0.538 129.901,0.469 129.603,0.42 129.302,0.391 129.019,0.381 129.001,0.383 129,0.383 129,0.415 128.997,0.414 128.998,0.383 2.54,0.383 2.526,0.382 2.352,0.389 2.165,0.414 1.981,0.455 1.802,0.511 1.628,0.583 1.461,0.67 1.302,0.772 1.152,0.886 1.013,1.013 0.886,1.152 0.772,1.302 0.67,1.461 0.583,1.628 0.511,1.802 0.455,1.981 0.414,2.165 0.389,2.352 0.382,2.526 0.383,2.54 0.383,84.998 0.414,84.997 0.415,85 0.383,85 0.383,85.001 0.381,85.019 0.391,85.302 0.42,85.603 0.469,85.901 0.538,86.196 0.626,86.485 0.732,86.768 0.857,87.043 1,87.31 1.159,87.566 1.335,87.812 1.527,88.046 1.734,88.266 1.954,88.473 2.188,88.665 2.434,88.841 2.69,89 2.957,89.143 3.232,89.268 3.515,89.374 3.804,89.462 4.099,89.531 4.397,89.58 4.698,89.609 4.982,89.619 5,89.617 129,89.617 129.018,89.619
V_+5VDCA on Power Plane (split plane): 113.371,75.446 113.371,67.554 104.158,58.342 104.13,58.3 104.121,58.25 104.121,38.804 100.908,35.592 100.88,35.55 100.871,35.5 100.871,19.379 97.129,19.379 97.129,21 97.129,37.25 97.129,38.696 98.092,39.658 98.12,39.7 98.129,39.75 98.129,43 98.12,43.05 98.092,43.092 97.129,44.054 97.129,50.75 97.12,50.8 97.092,50.842 96.279,51.654 95.279,52.654 94.654,53.279 94.129,53.804 94.129,55.621 95.75,55.621 95.8,55.63 95.842,55.658 97.092,56.908 97.12,56.95 97.129,57 97.129,60 97.129,70.25 97.12,70.3 97.092,70.342 96.092,71.342 96.05,71.37 96,71.379 93.5,71.379 93.45,71.37 93.408,71.342 91.446,69.379 71.5,69.379 71.45,69.37 71.408,69.342 44.946,42.879 33.5,42.879 33.45,42.87 33.408,42.842 33.398,42.826 33.38,42.83 33.331,42.82 33.289,42.792 33.261,42.75 33.251,42.7 33.251,35.184 28.946,30.879 25.054,30.879 24.129,31.804 24.129,36.696 24.804,37.371 27.5,37.371 27.55,37.38 27.592,37.408 28.342,38.158 28.37,38.2 28.379,38.25 28.379,40.5 28.379,40.669 28.37,40.719 28.342,40.761 27.299,41.804 27.299,43.866 29.342,45.908 30.054,46.621 38.75,46.621 38.8,46.63 38.842,46.658 76.804,84.621 104.196,84.621
V_-5VDCA on Power Plane (split plane): 65.371,35.379 33.51,35.379 33.51,42.621 45,42.621 45.05,42.63 45.092,42.658 65.371,62.937
-5V on Power Plane (split plane): 129.302,89.609 129.603,89.58 129.901,89.531 130.196,89.462 130.485,89.374 130.768,89.268 131.043,89.143 131.31,89 131.566,88.841 131.812,88.665 132.046,88.473 132.266,88.266 132.473,88.046 132.665,87.812 132.841,87.566 133,87.31 133.143,87.043 133.268,86.768 133.374,86.485 133.462,86.196 133.531,85.901 133.58,85.603 133.609,85.302 133.619,85.019 133.617,85.002 133.586,85.003 133.585,85 133.587,84.996 133.617,84.997 133.617,5 133.619,4.982 133.609,4.698 133.58,4.397 133.531,4.099 133.462,3.804 133.374,3.515 133.268,3.232 133.143,2.957 133,2.69 132.841,2.434 132.665,2.188 132.473,1.954 132.266,1.734 132.046,1.527 131.812,1.335 131.566,1.159 131.31,1 131.043,0.857 130.768,0.732 130.485,0.626 130.196,0.538 129.901,0.469 129.603,0.42 129.302,0.391 129.019,0.381 129.001,0.383 129,0.383 129,0.415 128.997,0.414 128.998,0.383 112.323,0.383 112.323,14.871 126.75,14.871 126.8,14.88 126.842,14.908 131.358,19.425 131.386,19.467 131.396,19.517 131.396,62.733 131.386,62.783 131.358,62.825 131.092,63.092 131.05,63.12 131,63.129 118.054,63.129 113.629,67.554 113.629,75.5 113.62,75.55 113.592,75.592 104.342,84.842 104.3,84.87 104.25,84.879 76.75,84.879 76.7,84.87 76.658,84.842 58.879,67.063 58.879,69.75 58.87,69.8 58.842,69.842 56.842,71.842 56.8,71.87 56.75,71.879 50.879,71.879 50.879,78.196 53.592,80.908 53.62,80.95 53.629,81 53.629,83 53.62,83.05 53.592,83.092 52.342,84.342 52.3,84.37 52.25,84.379 51.472,84.379 51.472,86.996 98.236,86.996 98.236,89.504 51.472,89.504 51.472,89.617 129,89.617 129.018,89.619
MON_VDD on Power Plane (split plane): 96.871,70.196 96.871,60 96.871,59.25 96.871,57.054 95.696,55.879 94,55.879 93.95,55.87 93.908,55.842 93.88,55.8 93.871,55.75 93.871,53.75 93.88,53.7 93.908,53.658 94.471,53.096 95.096,52.471 96.096,51.471 96.871,50.696 96.871,44 96.88,43.95 96.908,43.908 97.871,42.946 97.871,42.93 97.871,42.25 97.871,39.804 96.908,38.842 96.88,38.8 96.871,38.75 96.871,37.25 96.871,37 96.871,21 96.871,19.25 96.88,19.2 96.908,19.158 96.95,19.13 97,19.121 101,19.121 101.05,19.13 101.092,19.158 101.12,19.2 101.129,19.25 101.129,35.446 104.342,38.658 104.37,38.7 104.379,38.75 104.379,58.196 113.5,67.317 117.908,62.908 117.95,62.88 118,62.871 130.946,62.871 131.137,62.68 131.137,19.57 126.696,15.129 92.879,15.129 92.879,22.25 92.87,22.3 92.842,22.342 92.092,23.092 92.05,23.12 92,23.129 90,23.129 89.95,23.12 89.908,23.092 87.908,21.092 81.946,15.129 46.879,15.129 46.879,19.25 46.879,26.446 47.842,27.408 50.554,30.121 59.696,30.121 64.158,25.658 64.2,25.63 64.25,25.621 70.75,25.621 70.8,25.63 70.842,25.658 72.592,27.408 72.62,27.45 72.629,27.5 72.629,32.21 72.62,32.26 72.592,32.302 69.552,35.342 69.51,35.37 69.46,35.379 65.629,35.379 65.629,63.196 71.554,69.121 91.5,69.121 91.55,69.13 91.592,69.158 93.554,71.121 95.946,71.121
V_+5VDC on Power Plane (split plane): 28.121,40.616 28.121,40.5 28.121,40 28.121,38.304 27.446,37.629 24.75,37.629 24.7,37.62 24.658,37.592 23.908,36.842 23.88,36.8 23.871,36.75 23.871,31.75 23.88,31.7 23.908,31.658 24.908,30.658 24.95,30.63 25,30.621 29,30.621 29.05,30.63 29.092,30.658 33.554,35.121 69.406,35.121 72.371,32.156 72.371,27.554 70.696,25.879 64.304,25.879 59.842,30.342 59.8,30.37 59.75,30.379 50.5,30.379 50.45,30.37 50.408,30.342 47.658,27.592 46.658,26.592 46.63,26.55 46.621,26.5 46.621,19.25 46.621,19 46.621,15.129 28.304,15.129 19.342,24.092 19.3,24.12 19.25,24.129 9.804,24.129 7.879,26.054 7.879,30.946 18.554,41.621 27.116,41.621
V_+24VDCA on Power Plane (split plane): 53.371,82.946 53.371,81.054 50.658,78.342 50.63,78.3 50.621,78.25 50.621,70.304 49.196,68.879 34.25,68.879 34.2,68.87 34.158,68.842 29.408,64.092 29.38,64.05 29.371,64 29.371,51.304 27.446,49.379 24.554,49.379 23.879,50.054 23.879,65.446 42.554,84.121 51.298,84.121 51.342,84.112 51.386,84.121 52.196,84.121
V_-5VDCA on Power Plane (split plane): 5,89.617 51.213,89.617 51.213,89.504 41.246,89.504 41.246,86.996 51.213,86.996 51.213,84.379 42.5,84.379 42.45,84.37 42.408,84.342 23.658,65.592 23.63,65.55 23.621,65.5 23.621,51.629 17.5,51.629 17.45,51.62 17.408,51.592 0.908,35.092 0.88,35.05 0.871,35 0.871,21.25 0.88,21.2 0.908,21.158 12.158,9.908 12.2,9.88 12.25,9.871 28.946,9.871 32.908,5.908 32.95,5.88 33,5.871 83.75,5.871 83.8,5.88 83.842,5.908 92.804,14.871 112.064,14.871 112.064,0.383 2.54,0.383 2.526,0.382 2.352,0.389 2.165,0.414 1.981,0.455 1.802,0.511 1.628,0.583 1.461,0.67 1.302,0.772 1.152,0.886 1.013,1.013 0.886,1.152 0.772,1.302 0.67,1.461 0.583,1.628 0.511,1.802 0.455,1.981 0.414,2.165 0.389,2.352 0.382,2.526 0.383,2.54 0.383,84.998 0.414,84.997 0.415,85 0.383,85 0.383,85.001 0.381,85.019 0.391,85.302 0.42,85.603 0.469,85.901 0.538,86.196 0.626,86.485 0.732,86.768 0.857,87.043 1,87.31 1.159,87.566 1.335,87.812 1.527,88.046 1.734,88.266 1.954,88.473 2.188,88.665 2.434,88.841 2.69,89 2.957,89.143 3.232,89.268 3.515,89.374 3.804,89.462 4.099,89.531 4.397,89.58 4.698,89.609 4.982,89.619
V_-5VDCA on Power Plane (split plane): 58.621,69.696 58.621,66.804 38.696,46.879 30,46.879 29.95,46.87 29.908,46.842 29.158,46.092 27.078,44.011 27.05,43.969 27.04,43.919 27.04,41.879 18.5,41.879 18.45,41.87 18.408,41.842 7.658,31.092 7.63,31.05 7.621,31 7.621,26 7.63,25.95 7.658,25.908 9.658,23.908 9.7,23.88 9.75,23.871 19.196,23.871 28.158,14.908 28.2,14.88 28.25,14.871 82,14.871 82.05,14.88 82.092,14.908 87.092,19.908 90.054,22.871 91.946,22.871 92.621,22.196 92.621,15.054 83.696,6.129 33.054,6.129 29.092,10.092 29.05,10.12 29,10.129 12.304,10.129 1.129,21.304 1.129,34.946 17.554,51.371 23.621,51.371 23.621,50 23.63,49.95 23.658,49.908 24.408,49.158 24.45,49.13 24.5,49.121 27.5,49.121 27.55,49.13 27.592,49.158 29.592,51.158 29.62,51.2 29.629,51.25 29.629,63.946 34.304,68.621 49.25,68.621 49.3,68.63 49.342,68.658 50.842,70.158 50.87,70.2 50.879,70.25 50.879,71.621 56.696,71.621

## Keep-outs
Keep-Out Layer:
  lines w0.254: 0,85 ccw(c0,85) 0,85 ; 0,85 cw(c5,85) 5,90 129,90 cw(c129,85) 134,85 ; 0,85 0,2.54 ccw(c2.54,2.54) 2.54,0 5,0 129,0 ccw(c129,5) 134,5 ; 134,5 ccw(c134,5) 134,5 ; 134,5 ccw(c134,5) 134,5 ; 134,5 134,85 ; 134,85 ccw(c134,85) 134,85

## Other copper
Component Side:
  text "B293A M&M Single Board M.Southgate 2014" at 41.5,87.75 h1.5
Solder Side:
  text "B293A M&M Single Board M.Southgate 2014" at 41.5,87.75 h1.5
Power Plane (plane layer: these items are gaps in the copper):
  lines w0.254: 23.75,51.5 17.5,51.5 1,35 1,21.25 12.25,10 29,10 33,6 83.75,6 92.75,15 ; 25.5,49.25 24.5,49.25 ; 28.25,40 28.25,40.669 27.169,41.75 ; 28.25,40.5 28.25,38.25 27.5,37.5 24.75,37.5 24,36.75 24,31.75 25,30.75 29,30.75 33.5,35.25 35.79,35.25 69.46,35.25 72.5,32.21 72.5,27.5 70.75,25.75 64.25,25.75 59.75,30.25 57.75,30.25 ; 33.38,35.13 33.38,42.7 ; 33.5,42.75 45,42.75 71.5,69.25 85,69.25 91.5,69.25 93.5,71.25 96,71.25 97,70.25 97,59.25 ; 46.75,19 46.75,26.5 47.75,27.5 ; 46.75,19.25 46.75,15 ; 47.5,27.25 50.5,30.25 59,30.25 ; 50.75,71.75 56.75,71.75 58.75,69.75 58.75,66.75 ; 51.342,84.241 51.342,90.09 ; 65.5,35.25 65.5,63.25 ; 79.5,15 82,15 ; 88,21 82,15 ; 95.5,55.75 95.75,55.75 ; 97,37 97,38.75 98,39.75 98,43 97,44 97,50.75 96.187,51.563 95.187,52.563 94.563,53.187 94,53.75 94,55.75 95.75,55.75 ; 97,37.25 97,21 97,19.25 101,19.25 101,35.5 104.25,38.75 104.25,58.25 ; 97,60 97,57 95.75,55.75 ; 98,42.25 98,42.93 ; 112.194,-0.194 112.194,14.928 ; 24.5,49.25 27.5,49.25 29.5,51.25 29.5,64 34.25,68.75 49.25,68.75 50.75,70.25 50.75,78.25 53.5,81 53.5,83 52.25,84.25 42.5,84.25 23.75,65.5 23.75,50 24.5,49.25 ; 27.169,41.75 27,41.75 25,41.75 18.5,41.75 7.75,31 7.75,26 9.75,24 19.25,24 28.25,15 42.5,15 46.75,15 ; 27.169,41.75 27.169,43.919 29.25,46 30,46.75 30.75,46.75 38.75,46.75 76.75,84.75 104.25,84.75 113.5,75.5 113.5,67.5 ; 46.75,15 82,15 ; 82,15 87,20 90,23 92,23 92.75,22.25 92.75,15 ; 92.75,15 126.75,15 131.267,19.517 131.267,62.733 131,63 118,63 113.5,67.5 ; 104.25,58.25 113.5,67.5 ; 104.25,58.25 104.25,58.25
  text "B293A M&M Single Board M.Southgate 2014" at 41.5,87.75 h1.5
  text "B293A M&M Single Board M.Southgate 2014" at 41.5,87.75 h1.5

## Silkscreen, mask and mechanical layers (free items; w line width, h text height)
Top Overlay:
  lines w0.254: 112.5,76.5 112.5,76.25 112.75,76
  text "B293A M&M Single Board M.Southgate 2014" at 41.5,87.75 h1.5
  text "+ -" at 1.5,84.75 h2 r270
  text "+ -" at 1.5,69.75 h2 r270
  text "+ -" at 1.5,58.5 h2 r270
  text "+ -" at 1.5,47.25 h2 r270
  text "+ -" at 1.5,33.5 h2 r270
  text "+ -" at 1.5,23.5 h2 r270
  text "+ -" at 15.75,9.5 h2
  text "+ -" at 25,9.5 h2
  text "+ -" at 16,6.75 h2
  text "Fan" at 16.25,4 h2
  text "24V" at 16.25,1.25 h2

## Text inside footprints (layer, text, board x,y; h text height)
P1: Top Overlay "2" at 92.46,56.632 h1.27; Top Overlay "1" at 92.46,54.092 h1.27; Top Overlay "19" at 119.384,54.092 h1.27; Top Overlay "20" at 119.384,56.632 h1.27
P3: Top Overlay "2" at 62.792,63.365 h1.27 r270; Top Overlay "1" at 60.252,63.365 h1.27 r270; Top Overlay "19" at 60.252,36.441 h1.27 r270; Top Overlay "20" at 62.792,36.441 h1.27 r270
P13: Top Overlay "2" at 28.432,53.14 h1.27 r270; Top Overlay "1" at 25.892,53.14 h1.27 r270; Top Overlay "19" at 26,26 h1.27 r270; Top Overlay "20" at 28.432,26.216 h1.27 r270